# Altium PCB TG21_Slave_Device_Led.PcbDoc
Units mil, origin at the board's own origin, x right, y up, seen from the top; angles counter-clockwise.
Board outline 3544 x 2755 mil, 2 copper layers (Top Layer, Bottom Layer), stack 61.855 mil thick; 56 components, 34 nets, 157 pads, 520 vias.
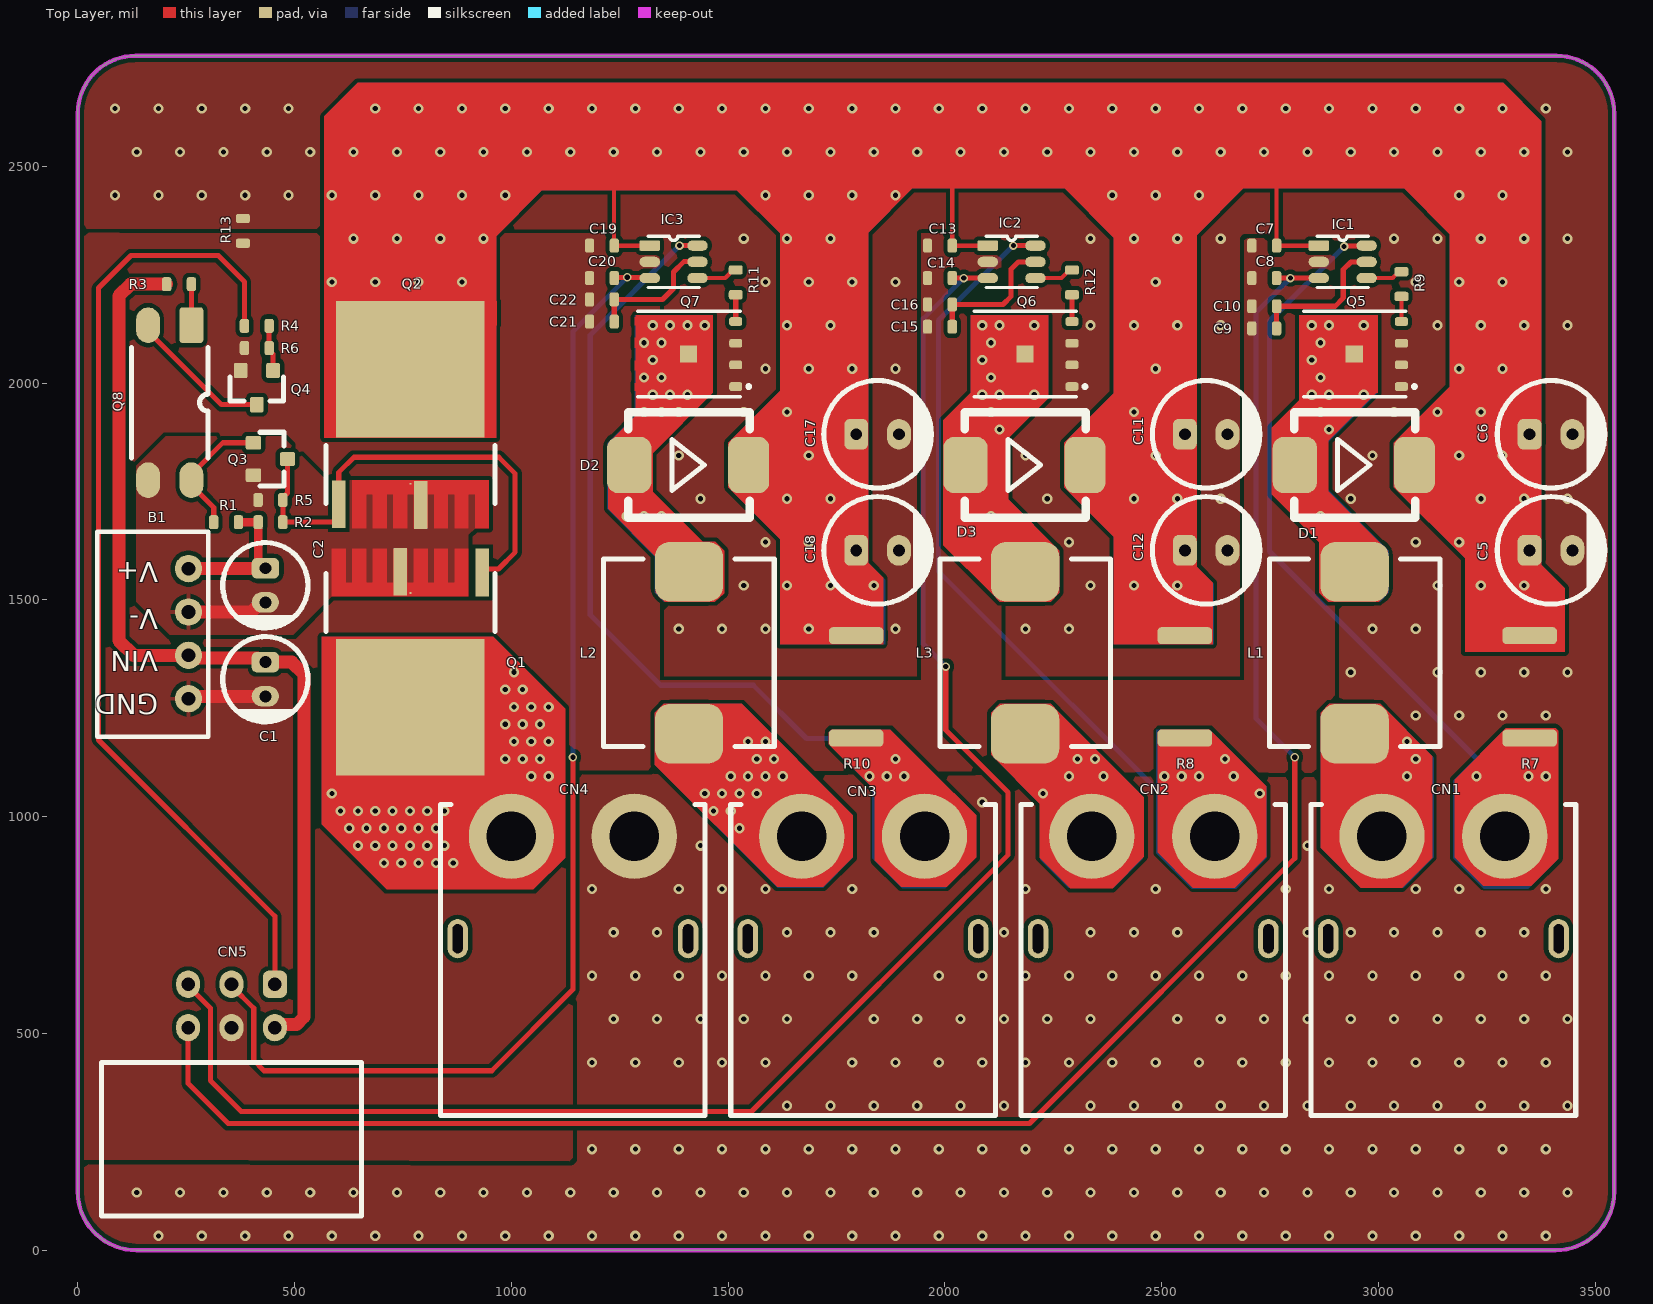
[diagram p0: Top Layer view]
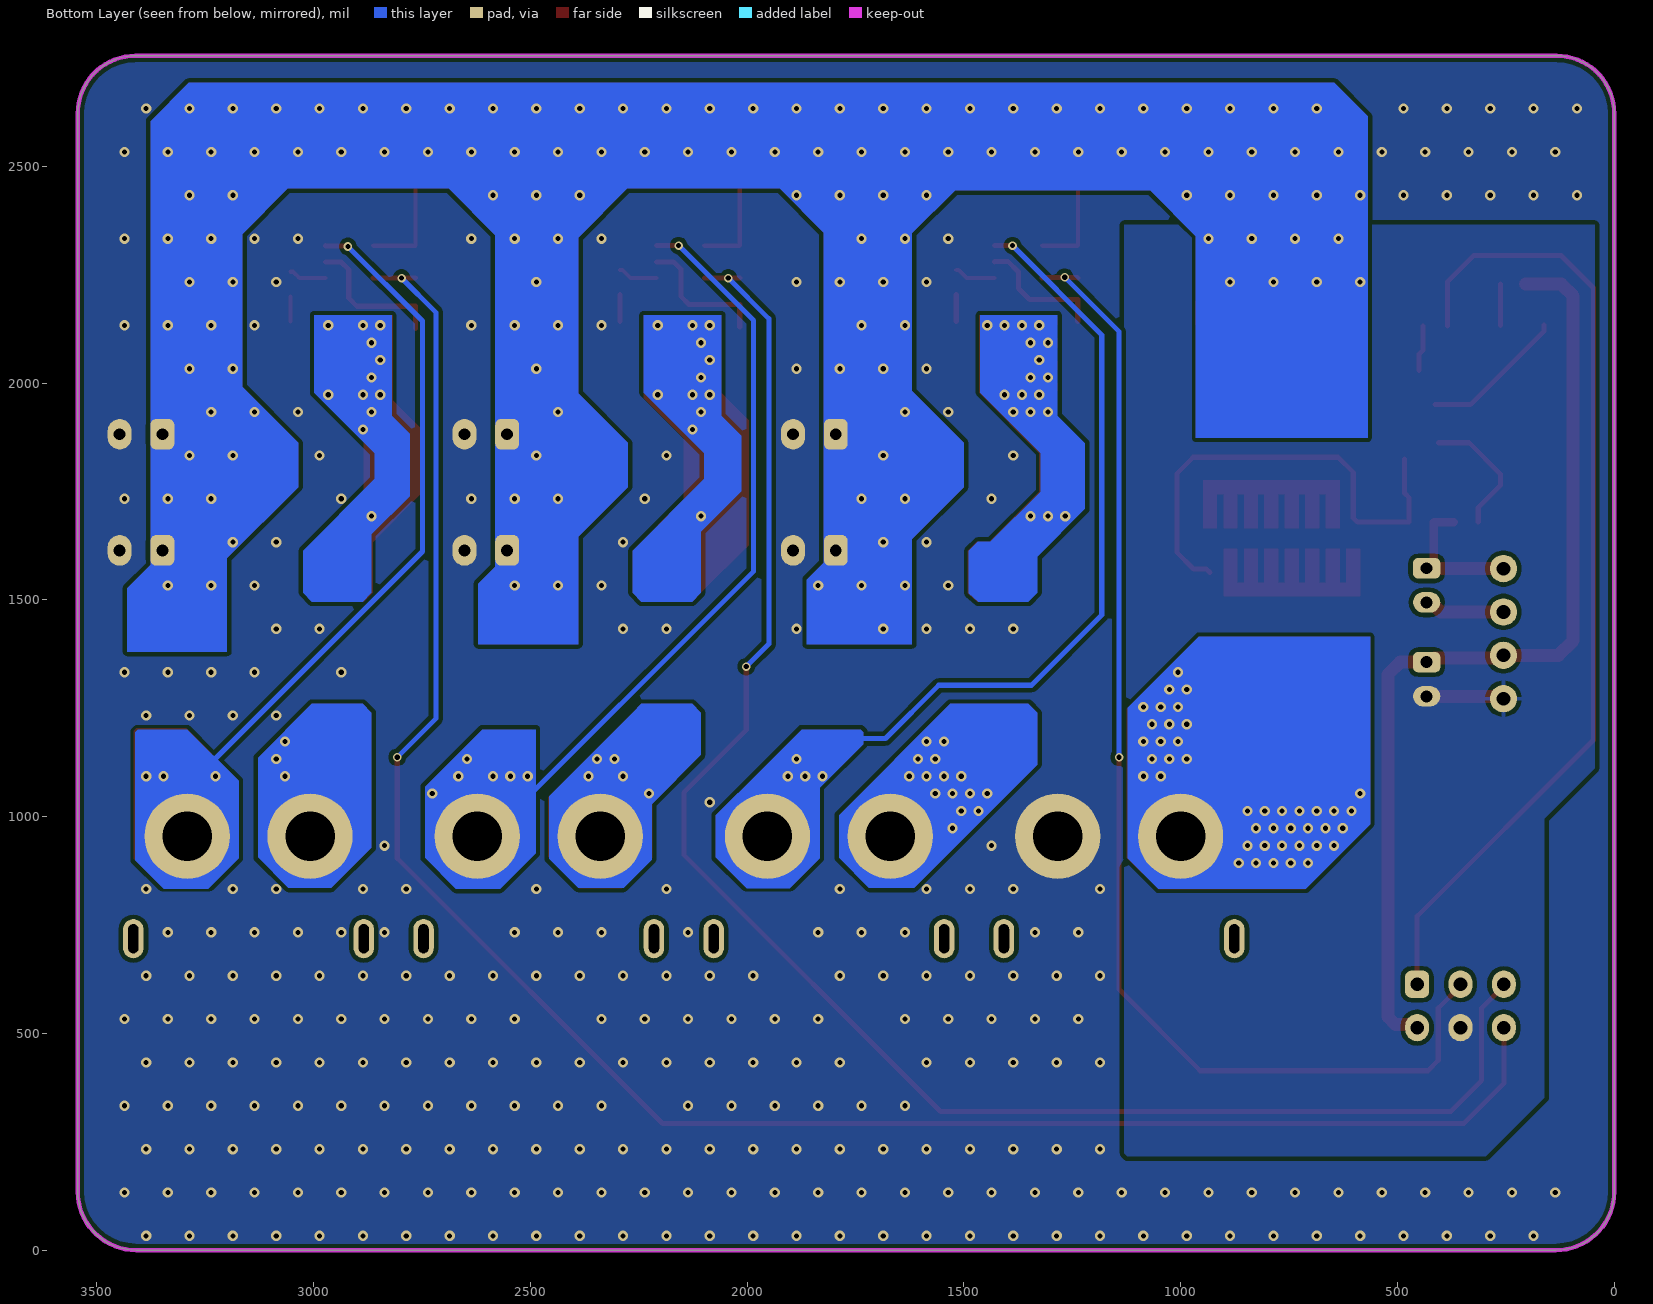
[diagram p1: Bottom Layer view, seen from below]
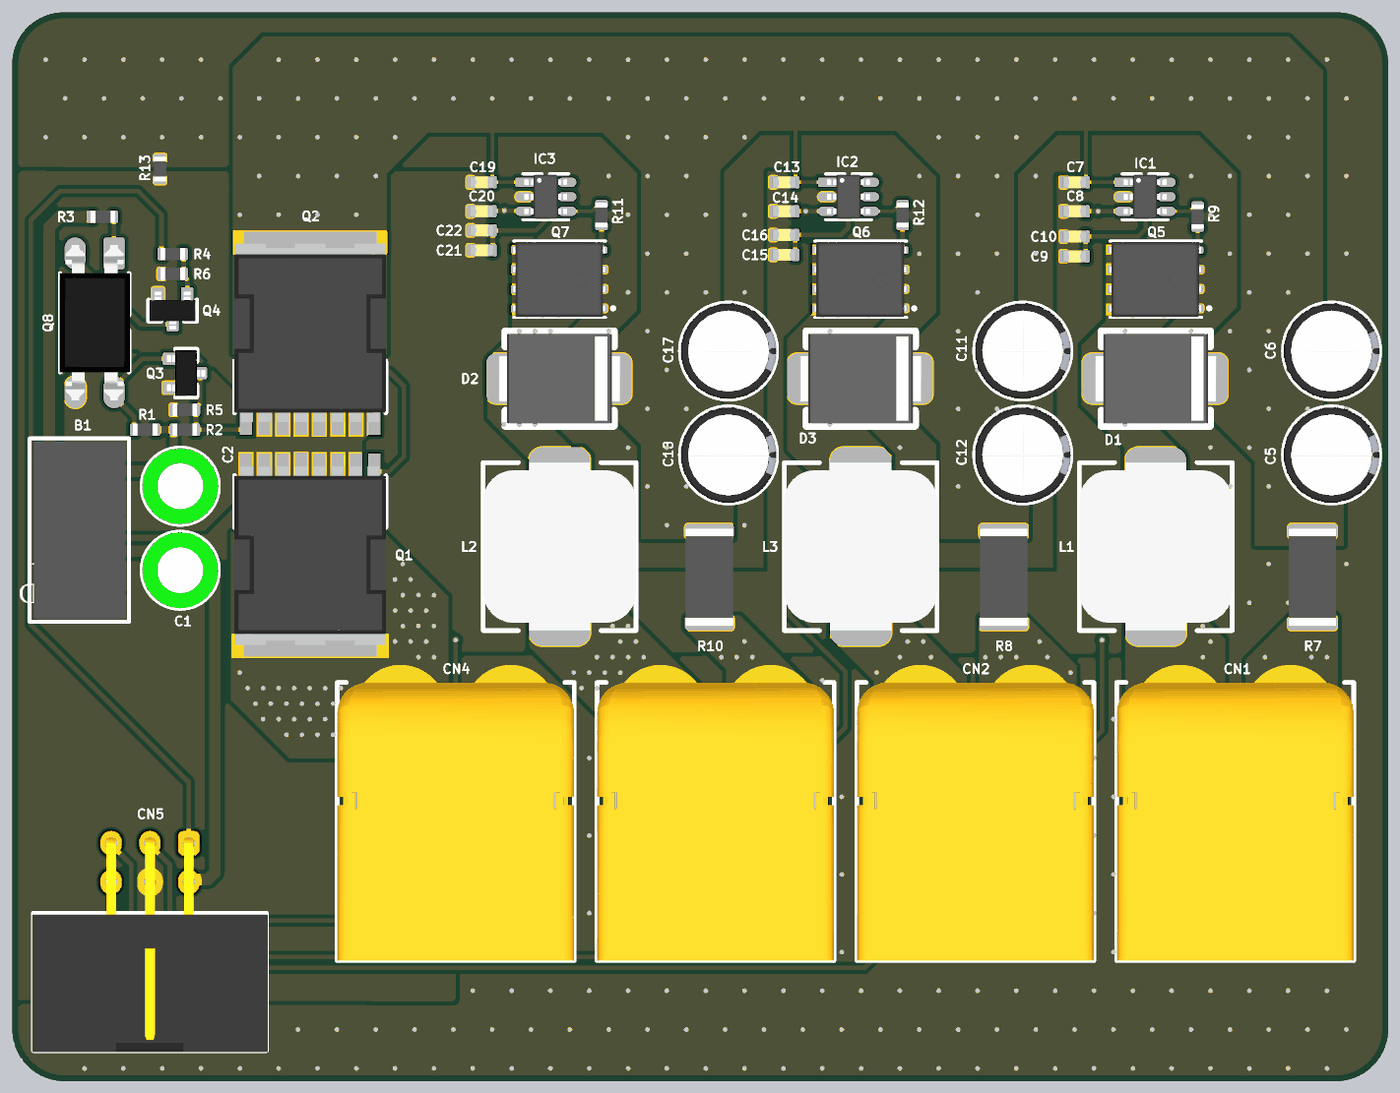
[diagram p2: 3D render of the assembled board from above, using the file's embedded part models]

## Layer stack, top to bottom
Top Solder: solder mask 0.4, Solder Resist, Dk 3.5
Top Layer: signal copper 1.4
Dielectric 1: dielectric 59.0551, FR-4, Dk 4.8
Bottom Layer: signal copper 1.4
Bottom Solder: solder mask 0.4, Solder Resist, Dk 3.5

## Board outline
0,135.01 0,2621.54 cw(c133.46,2621.54) 133.46,2755 3410.54,2755 cw(c3410.54,2621.54) 3544,2621.54 3544,135.01 cw(c3408.99,135.01) 3408.99,0 135.01,0 cw(c135.01,135.01)

## Design rules (kind name [scope] priority, off if disabled: settings)
BoardOutlineClearance [All] p1: gap=7.87 ignorepadtopadclearanceinfootprint=FALSE
Clearance [All] p1: gap=10 ignorepadtopadclearanceinfootprint=FALSE
ComponentClearance [All] p1: gap=5 collisioncheckmode=3 verticalgap=5 showdistances=TRUE
DiffPairsRouting [All] p1: maxlimit=10 minlimit=5 mostfreqgap=5 toplayer_minwidth=5 toplayer_maxwidth=1000 toplayer_prefwidth=5 bottomlayer_minwidth=5 bottomlayer_maxwidth=1000 bottomlayer_prefwidth=5 maxuncoupledlength=500
Height [All] p1: minheight=0 maxheight=71497.94 prefheight=500
HoleSize [All] p1: absolutevalues=TRUE maxlimit=248.03 minlimit=11.81 maxpercent=80.000 minpercent=20.000
HoleToHoleClearance [All] p1: gap=9.84 allowstackedmicrovias=FALSE
MinimumAnnularRing [All] p1: minimumring=3
MinimumSolderMaskSliver [All] p1: minsoldermaskwidth=0
PlaneClearance [All] p1: clearance=5
PlaneConnect PlaneConnectPowerPads [InPadClass('PowerPads')] p1: planeconnectstyle=Direct reliefexpansion=20 reliefentries=4 reliefconductorwidth=10 reliefairgap=10
PlaneConnect [All] p2: pad.planeconnectstyle=Relief pad.reliefexpansion=11.81 pad.reliefentries=4 pad.reliefconductorwidth=5 pad.reliefairgap=5 via.planeconnectstyle=Direct via.reliefexpansion=11.81 via.reliefentries=4 via.reliefconductorwidth=5 via.reliefairgap=5
PolygonConnect PolygonConnectPowerPads [All vs (InPadClass('PowerPads'))] p1: connectstyle=Direct reliefconductorwidth=10 reliefentries=4 polygonreliefangle="90 Angle" airgapwidth=10
PolygonConnect [All] p2: connectstyle=Direct reliefconductorwidth=5 reliefentries=4 polygonreliefangle="90 Angle" airgapwidth=5
RoutingVias [All] p1: holewidth=11.81 width=23.62 viastyle="Through Hole" minholewidth=11.81 minwidth=23.62 maxholewidth=23.62 maxwidth=259.84
SilkToSilkClearance [All] p1: silktosilkclearance=0
SilkToSolderMaskClearance [IsPad] p1: minsilkscreentomaskgap=5 clearancetoexposedcopper=TRUE
SolderMaskExpansion [All] p1: expansion=2.95 istentingtop=FALSE
Width [All] p1: maxlimit=1000 minlimit=5 preferedwidth=5 minimp=50.000000 maximp=50.000000 favimp=50.000000
20 further rules are at their usual default settings.

## Components (designator, comment, footprint, x,y, rotation, side; value= is the part's Value field where it differs from the comment)
B1 "B1212S-1W" SIP-4 255.59,1272.05 r90 top
C1 "4.7uF" PLUGIN,D5xL11mm 432.75,1316.93 r270 top
C2 "4.7uF" PLUGIN,D5xL11mm 432.75,1533.47 r270 top
C5 "47uF" PLUGIN,D6.3xL12mm 3397.98,1614.17 r0 top
C6 "47uF" PLUGIN,D6.3xL12mm 3397.98,1881.89 r0 top
C7 "100nF" CAP-0603 2736.57,2316.93 r180 top
C8 "100pF" CAP-0603 2736.57,2242.13 r180 top
C9 "1uF" CAP-0603 2736.57,2125.99 r180 top
C10 "100nF" CAP-0603 2736.57,2177.17 r180 top
C11 "47uF" PLUGIN,D6.3xL12mm 2602.71,1881.89 r0 top
C12 "47uF" PLUGIN,D6.3xL12mm 2602.71,1614.17 r0 top
C13 "100nF" CAP-0603 1988.54,2316.93 r180 top
C14 "100pF" CAP-0603 1988.54,2242.13 r180 top
C15 "1uF" CAP-0603 1988.54,2129.92 r180 top
C16 "100nF" CAP-0603 1988.54,2181.1 r180 top
C17 "47uF" PLUGIN,D6.3xL12mm 1844.84,1881.89 r0 top
C18 "47uF" PLUGIN,D6.3xL12mm 1844.84,1614.17 r0 top
C19 "100nF" CAP-0603 1209.01,2316.93 r180 top
C20 "100pF" CAP-0603 1209.01,2242.13 r180 top
C21 "1uF" CAP-0603 1209.01,2141.73 r180 top
C22 "100nF" CAP-0603 1209.01,2192.91 r180 top
CN1 "XT60PW-M" XT60PW-M 3149.95,718.5 r180 top locked
CN2 "XT60PW-M" XT60PW-M 2480.66,718.5 r180 top locked
CN3 "XT60PW-M" XT60PW-M 1811.37,718.5 r180 top locked
CN4 "XT60PW-M" XT60PW-M 1142.08,718.5 r180 top locked
CN5 "IDC2.54-3P" "IDC Through Hole,Right Angle,P=2.54mm, 2x3P" 354.68,563.39 r0 top locked
D1 "B560C-13-F" SMC 2945.23,1811.02 r0 top
D2 "B560C-13-F" SMC 1409.8,1811.02 r0 top
D3 "B560C-13-F" SMC 2185.39,1811.02 r0 top
IC1 "FL7760BM6X" SOT23-6 2917.67,2279.53 r0 top
IC2 "FL7760BM6X" SOT23-6 2153.89,2279.53 r0 top
IC3 "FL7760BM6X" SOT23-6 1374.36,2279.53 r0 top
L1 "22uH" SMD,11x10mm 2945.23,1377.95 r90 top
L2 "22uH" SMD,11x10mm 1409.8,1377.95 r90 top
L3 "22uH" SMD,11x10mm 2185.39,1377.95 r90 top
Q1 "SFT018N100C3" TOLL 767.4,1356.3 r270 top
Q2 "SFT018N100C3" TOLL 767.4,1927.17 r90 top
Q3 "1P" SOT-23 447.91,1824.8 r0 top
Q4 "1P" SOT-23 413.07,1986.22 r270 top
Q5 "TPH3R70A" PDFN5060-8L-1.1MM 2945.23,2066.93 r180 top
Q6 "TPH3R70A" PDFN5060-8L-1.1MM 2185.39,2066.93 r180 top
Q7 "TPH3R70A" PDFN5060-8L-1.1MM 1409.8,2066.93 r180 top
Q8 "PC817C" SOP-4 212.28,1954.73 r270 top
R1 "10K" RES-0603 342.2,1679.13 r0 top
R2 "1K" RES-0603 444.57,1679.13 r180 top
R3 "1K" RES-0603 233.74,2228 r0 top
R4 "1K" RES-0603 413.07,2131.89 r0 top
R5 "10K" RES-0603 444.57,1730.32 r0 top
R6 "10K" RES-0603 413.07,2080.71 r0 top
R7 "33mR" RES-2512 3348.77,1299.21 r90 top
R8 "33mR" RES-2512 2553.5,1299.21 r90 top
R9 "0R" RES-0603 3053.1,2228.35 r90 top
R10 "33mR" RES-2512 1795.62,1299.21 r90 top
R11 "0R" RES-0603 1517.67,2232.28 r90 top
R12 "0R" RES-0603 2293.26,2232.28 r90 top
R13 "0R" RES-0603 381,2351 r270 top

## Footprints (in the part's own frame and the unit in brackets; to place one, negate y for a bottom-side part, rotate by r counter-clockwise, add the part's x,y. Pads: shape width x height; smd on the part's side, far side on the other; paste and mask are expansions set on the pad)
CAP-0603 [mm]
  rrect50% 0.55x0.82 smd: 1(-0.725,0) 2(0.725,0)
  body extent -0.8,-0.4 0.8,0.4, height 0.8
"IDC Through Hole,Right Angle,P=2.54mm, 2x3P" [mm]
  rrect50% 1.4x1.6 hole 0.8 mask+0.15: 1(2.54,1.27)
  oval 1.4x1.6 hole 0.8 mask+0.15: 2(0,1.27) 3(-2.54,1.27) 4(-2.54,-1.27) 5(0,-1.27) 6(2.54,-1.27)
  silkscreen extent -7.62,-12.31 7.62,-3.31, body extent -7.71,-12.4 7.71,1.62, height 8.8
PDFN5060-8L-1.1MM [mm]
  rrect50% 0.76x0.51 smd: 1(-2.74,1.905) 2(-2.74,0.635) 3(-2.74,-0.635) 4(-2.74,-1.905)
  rect 1x1 smd paste-1 mask+0: 5_8(0.025,0)
  Top Layer region: 3.18,1.7 2.63,1.7 2.63,0.94 3.18,0.94 3.18,0.38 2.63,0.38 2.63,-0.38 3.18,-0.38 3.18,-0.94 2.63,-0.94 2.63,-1.7 3.18,-1.7 3.18,-2.16 2.63,-2.16 2.63,-2.26 -1.34,-2.26 -1.34,2.26 2.63,2.26 2.63,2.16 3.18,2.16
  silkscreen extent -3.6,-2.5 3,2.5, body extent -2.97,-2.45 3.03,2.45, height 1.1
PLUGIN,D5xL11mm [mm]
  rrect50% 1.2x1.6 hole 0.7: 1(-1,0)
  oval 1.2x1.6 hole 0.7: 2(1,0)
  silkscreen extent -2.5,-2.5 2.5,2.5, body extent -2.5,-2.5 2.5,2.5, height 12
PLUGIN,D6.3xL12mm [mm]
  rrect50% 1.4x1.8 hole 0.7: 1(-1.25,0)
  oval 1.4x1.8 hole 0.7: 2(1.25,0)
  silkscreen extent -3.15,-3.15 3.15,3.15, body extent -3.15,-3.15 3.15,3.15, height 12
RES-0603 [mm]
  rrect50% 0.55x0.82 smd: 1(-0.725,0) 2(0.725,0)
  body extent -0.8,-0.4 0.8,0.4, height 0.45
RES-2512 [mm]
  rrect50% 1x3.2 smd: 1(-3,0) 2(3,0)
  body extent -3.17,-1.55 3.17,1.55, height 0.65
SIP-4 [mm]
  round 1.6 hole 0.8: 1(0,0) 2(2.54,0) 3(5.08,0) 4(7.62,0)
  silkscreen extent -2.23,-1.15 9.77,5.35, body extent -2.03,-0.92 9.57,5.07, height 10
SMC [mm]
  rrect50% 2.6x3.3 smd: 1(-3.5,0)
  rrect50% 2.4x3.3 smd: 2(3.5,0)
  silkscreen extent -3.55,-3.1 3.55,3.1, body extent -3.97,-2.95 3.97,2.95, height 2.27
SMD,11x10mm [mm]
  rrect50% 3.5x4 smd: 1(-4.75,0) 2(4.75,0)
  silkscreen extent -5.5,-5 5.5,5, body extent -5.5,-5 5.5,5, height 7.9
SOP-4 [mm]
  rrect25% 2.09x1.39 smd: 1(-4.54,1.27)
  oval 2.09x1.39 smd: 2(-4.54,-1.27) 3(4.54,-1.27) 4(4.54,1.27)
  silkscreen extent -3.22,-2.25 3.22,2.25, body extent -5.08,-2.3 5.08,2.3, height 3.78
SOT23-6 [mm]
  rrect25% 1.2x0.6 smd: 1(-1.4,0.95)
  oval 1.2x0.6 smd: 2(-1.4,0) 3(-1.4,-0.95) 4(1.4,-0.95) 5(1.4,0) 6(1.4,0.95)
  silkscreen extent -1.5,-1.5 1.5,1.5, body extent -1.4,-1.45 1.4,1.45, height 1.45
SOT-23 [mm]
  rrect25% 0.9x0.8 smd: 1(-1.085,0.95) 2(-1.085,-0.95) 3(0.915,0)
  silkscreen extent -0.7,-1.57 0.7,1.57, body extent -1.25,-1.5 1.25,1.5, height 1.1
TOLL [mm]
  rect 2.8x0.8 smd: 1(-5.25,4.2) 2(-5.3,-0.6)
  rect 0.1x0.1 smd paste-1 mask+0: 2(-4.05,0) 3(0,0)
  rect 8x8.7 smd: 3(2.65,0)
  Top Layer region: 6.65,-5.05 5.25,-5.05 5.25,-4.35 2.35,-4.35 2.35,-4.85 -1.35,-4.85 -1.35,4.85 2.35,4.85 2.35,4.35 5.25,4.35 5.25,5.05 6.65,5.05
  Top Layer region: -3.85,-4.6 -6.65,-4.6 -6.65,-3.8 -4.65,-3.8 -4.65,-3.4 -6.65,-3.4 -6.65,-2.6 -4.65,-2.6 -4.65,-2.2 -6.65,-2.2 -6.65,-1.4 -4.65,-1.4 -4.65,-1 -6.65,-1 -6.65,-0.2 -4.65,-0.2 -4.65,0.2 -6.65,0.2 -6.65,1 -4.65,1 -4.65,1.4 -6.65,1.4 -6.65,2.2 -4.65,2.2 -4.65,2.6 -6.65,2.6 -6.65,3.4 -3.85,3.4
  silkscreen extent -5.2,-4.95 -1.8,4.95, body extent -5.79,-4.95 5.89,4.95, height 2.31
XT60PW-M [mm]
  round 5 hole 2.9 mask+0.5: 1(3.6,-6) 2(-3.6,-6)
  oval 1.2x2.3 hole 0.6 slot 1.7 at 90 deg: ""(-6.75,0) ""(6.75,0)
  silkscreen extent -7.75,-7.85 7.75,10.35, body extent -7.75,-7.85 7.75,10.35, height 8.4

## Part data
B1: library part B1212-1W, "Isolated Module DC DC Converter Buck 1 Output 12V 84mA 10.8V~13.2V Input", LCSC Part #=C512042, Manufacturer=RLT, Package=SIP,11.6x6mm, Key Attributes="DC-DC modular power supply/1000V isolation, 1W", Link=https://www.lcsc.com/product-detail/C512042.html?s_z=n_q_p_B1212-1W&spm=wm.ssy.bg.0.xh&lcsc_vid=Q1VfX1ReRFFaUFJSRgIIUV0CFFgIBFJfT1hdVlwEEVkxVlNRT1RZVlVRTlFWUTsOAxUeFF5JWBYZEEoKFBINSQcJGk4NBhADEA4cHktXRFZWSQwSGg0%3D, Mfr. Part #=B1212S-1W
C1 C2: library part 50YXF4R7MEFC5X11, "4.7uF 50V Aluminum Electrolytic Capacitors Through Hole,D5xL11mm 5000hrs@105℃", DigiKey Part Number=1189-1862-ND, LCSC Part #=C88759, Manufacturer=Rubycon, Package="Through Hole,D5xL11mm", ComponentLink1Description=Link, ComponentLink1URL=https://www.lcsc.com/product-detail/C88759.html, ComponentLink2Description="Link 1", ComponentLink2URL=https://www.digikey.com/en/products/detail/rubycon/50YXF4-7MEFC5X11/3562866?s=N4IgTCBcDaIKwAYCaANAYgFgEoHYCyAomgMJwoCM5IAugL5A, Mfr.Part #=50YXF4R7MEFC5X11
C5 C6 C11 C12 C17 C18: library part ERS1JM470E12OT, "47uF 63V Aluminum Electrolytic Capacitors Through Hole,D6.3xL12mm 5000hrs@105℃", DigiKey Part Number=NO, LCSC Part #=C106674, Manufacturer=AISHI, Package="Through Hole,D6.3xL12mm", ComponentLink1Description=Link, ComponentLink1URL=https://www.lcsc.com/product-detail/C106674.html?s_z=n_C106674, ComponentLink2Description="Link 1", Mfr.Part #=ERS1JM470E12OT
C7 C10 C13 C16 C19 C22: library part CL10B104KB8NNNC, "100nF ±10% 50V Ceramic Capacitor X7R 0603", DigiKey Part Number=1276-1000-2-ND, LCSC Part #=C1591, Manufacturer="Samsung Electro-Mechanics", Package=0603, ComponentLink1Description=Link, ComponentLink1URL=https://www.lcsc.com/product-detail/C1591.html?s_z=n_CL10B104KB8NNC, ComponentLink2Description="Link 1", ComponentLink2URL=https://www.digikey.com/en/products/detail/samsung-electro-mechanics/CL10B104KB8NNNC/3886658?s=N4IgTCBcDaIMIBkCMAGAQqgLAaTQDgDki4QBdAXyA, Mfr.Part #=CL10B104KB8NNNC
C8 C14 C20: library part CL10C101JB8NNNC, "100pF ±5% 50V Ceramic Capacitor C0G 0603", DigiKey Part Number=1276-1008-2-ND, LCSC Part #=C14858, Manufacturer="Samsung Electro-Mechanics", Package=0603, ComponentLink1Description=Link, ComponentLink1URL=https://www.lcsc.com/product-detail/C14858.html?s_z=n_CL10C101JBNNNC, ComponentLink2Description="Link 1", ComponentLink2URL=https://www.digikey.com/en/products/detail/samsung-electro-mechanics/CL10C101JB8NNNC/3886666?s=N4IgTCBcDaIMIBkCMAGOqkCkBCAOAcoXCALoC%2BQA, Mfr.Part #=CL10C101JB8NNNC
C9 C15 C21: library part CL10B105KB8NQNC, "1uF ±10% 50V Ceramic Capacitor X7R 0603", DigiKey Part Number=NO, LCSC Part #=C5199872, Manufacturer="Samsung Electro-Mechanics", Package=0603, ComponentLink1Description=Link, ComponentLink1URL=https://www.lcsc.com/product-detail/C5199872.html, ComponentLink2Description="Link 1", Mfr.Part #=CL10B105KB8NQNC
CN1 CN2 CN3 CN4: "Banana and Tip Connector Adapters RoHS", DigiKey Part Number=NO, LCSC Part #=C98732, Manufacturer="Changzhou Amass Elec", ComponentLink1Description=Link, ComponentLink1URL=https://www.lcsc.com/product-detail/C98732.html?s_z=n_XT60, Mfr.Part #=XT60PW-M, Package=XT60PW-M
CN5: library part 2.54-2*3P, "Connector IDC Header Through Hole, Right Angle 6 position 2.54mm", DigiKey Part Number=NO, LCSC Part #=C34945, Manufacturer="BOOMELE(Boom Precision Elec)", Package="Through Hole,Right Angle,P=2.54mm", ComponentLink1Description=Link, ComponentLink1URL=https://www.lcsc.com/product-detail/C34945.html, Mfr.Part #=2.54-2*3P, System=Connector
D1 D2 D3: "100A 1 Independent 60V 700mV@5A 5A SMC(DO-214AB) Single Diodes RoHS", DigiKey Part Number=NO, LCSC Part #=C85100, Manufacturer=DIODES, Package=SMC(DO-214AB), ComponentLink1Description=Link, ComponentLink1URL=https://www.lcsc.com/product-detail/C85100.html?s_z=n_C85100, ComponentLink2Description="Link 1", ComponentLink2URL=https://www.digikey.com/en/products/detail/diodes-incorporated/B560C-13-F/768773, Mfr.Part #=B560C-13-F
IC1 IC2 IC3: "High-Side Sensing Constant Current Buck Controller for High Switching Frequency LED Driver", DigiKey Part Number=FL7760BM6XOSTR-ND, LCSC Part #=C367388, Manufacturer=onsemi, Package=SOT-23-6, ComponentLink1Description=Link, ComponentLink1URL=https://www.lcsc.com/product-detail/C367388.html?s_z=n_FL7760&spm=wm.ssy.bg.0.xh&lcsc_vid=QVhYA1deElkMBVEAQVVWVAECEVVXUAcCTgNYUQVSEVAxVlNRQ1hYVFBfTlhcXzsOAxUeFF5JWBYZEEoKFBINSQcJGk4eFQsCAgIaSgADAwAHC0slRlleUFNRQlhADxALGw%3D%3D, ComponentLink2Description="Link 1", ComponentLink2URL=https://www.digikey.com/en/products/detail/onsemi/FL7760BM6X/7804375?s=N4IgTCBcDaIGIBkDsSBsAGAQgWVQDRAF0BfIA, Mfr.Part #=FL7760BM6X
L1 L2 L3: library part PSPMAA1082T-220M-CGP, "8A 22uH 35mΩ 10A Molded Inductor ±20% SMD,11x10mm Fixed Inductors RoHS", DigiKey Part Number=NO, LCSC Part #=C47149121, Manufacturer="PROD Tech", Package=SMD,11x10mm, ComponentLink1Description=Link, ComponentLink1URL=https://www.lcsc.com/product-detail/C47149121.html?s_z=n_C47149121, ComponentLink2Description="Link 1", Mfr.Part #=PSPMAA1082T-220M-CGP
Q1 Q2: "N-Channel 100V 320A 312W Surface Mount TOLL", DigiKey Part Number=NO, LCSC Part #=C42395330, Manufacturer=SCILICON, Package=TOLL, ComponentLink1Description=Link, ComponentLink1URL=https://www.lcsc.com/product-detail/C42395330.html?s_z=n_c42395330, ComponentLink2Description="Link 1", Mfr.Part #=SFT018N100C3
Q3 Q4: library part MMBT2222ALT1G, "Bipolar (BJT) Transistor NPN 40V 600mA 225mW Surface Mount SOT-23", DigiKey Part Number=MMBT2222ALT1GOSTR-ND, LCSC Part #=C82460, Manufacturer=onsemi, Package=SOT-23, ComponentLink1Description=Link, ComponentLink1URL=https://www.lcsc.com/product-detail/C82460.html?s_z=n_mmbt, ComponentLink2Description="Link 1", ComponentLink2URL=https://www.digikey.com/en/products/detail/onsemi/MMBT2222ALT1G/919593, Mfr.Part #=MMBT2222ALT1G
Q5 Q6 Q7: library part TPH3R70APL,L1Q(M, "N-Channel 100V 90A 170W SOP-8-Advance", DigiKey Part Number=264-TPH3R70APLL1QTR-ND, LCSC Part #=C471285, Manufacturer=TOSHIBA, Package=PDFN5060-8L, ComponentLink1Description=Link, ComponentLink1URL=https://www.lcsc.com/product-detail/C20605803.html?s_z=n_YJG60N04AQ, ComponentLink2Description="Link 1", ComponentLink2URL=264-TPH3R70APLL1QTR-ND, Mfr.Part #=TPH3R70APL,L1Q(M
Q8: library part "HXY MOSFET PC817C", "Phototransistor Output 5kVrms 1 Channel SMD-4P", DigiKey Part Number=NO, LCSC Part #=C5451663, Manufacturer="HXY MOSFET", Package=SMD-4P, ComponentLink1Description=Link, ComponentLink1URL=https://www.lcsc.com/product-detail/C5451663.html?s_z=n_c5451663, ComponentLink2Description="Link 1", Mfr.Part #=PC817C
R1 R5 R6: library part RC0603FR-0710KL, "100mW 10kΩ 75V Thick Film Resistor ±100ppm/℃ ±1% 0603 Chip Resistor - Surface Mount RoHS", DigiKey Part Number=311-10.0KHRTR-ND, LCSC Part #=C98220, Manufacturer=YAGEO, Package=0603, ComponentLink1Description=Link, ComponentLink1URL=https://www.lcsc.com/product-detail/C98220.html?s_z=n_C98220, ComponentLink2Description="Link 1", ComponentLink2URL=https://www.digikey.com/en/products/detail/yageo/RC0603FR-0710KL/726880?s=N4IgTCBcDaIMwEYEFoEAYB0aDSAJASgCr7IByAIiALoC%2BQA, Mfr.Part #=RC0603FR-0710KL
R2 R3 R4: library part RC0603FR-071KL, "100mW 1kΩ 75V Thick Film Resistor ±100ppm/℃ ±1% 0603 Chip Resistor - Surface Mount RoHS", DigiKey Part Number=311-1.00KHRTR-ND, LCSC Part #=C22548, Manufacturer=YAGEO, Package=0603, ComponentLink1Description=Link, ComponentLink1URL=https://www.lcsc.com/product-detail/C22548.html?s_z=n_C22548, ComponentLink2Description="Link 1", ComponentLink2URL=https://www.digikey.com/en/products/detail/yageo/RC0603FR-071KL/726843?s=N4IgTCBcDaIEoGEAMA2JBmAYnAtEg7AIwDSAMiALoC%2BQA, Mfr.Part #=RC0603FR-071KL
R7 R8 R10: library part HoLLR2512-3W-33mR-1%, "33mΩ 3W Current Sense Resistor ±1% ±50ppm/℃ 2512 Chip Resistor - Surface Mount RoHS", DigiKey Part Number=NO, LCSC Part #=C2985721, Manufacturer=Milliohm, Package=2512, ComponentLink1Description=Link, ComponentLink1URL=https://www.lcsc.com/product-detail/C2985721.html?spm=wm.fly.bg.0.xh&lcsc_vid=EQVeAlBQE1lfUQdeRVANVgZXElUKUAUCRwdWVVRWQVUxVlNRQ1hbUlRURFJdVDtW, ComponentLink2Description="Link 1", Mfr.Part #=HoLLR2512-3W-33mR-1%
R9 R11 R12 R13: library part RC0603FR-070RL, "0Ω 100mW 75V Thick Film Resistor ±1% 0603 Chip Resistor - Surface Mount RoHS", DigiKey Part Number=311-0.0HRTR-ND, LCSC Part #=C100044, Manufacturer=YAGEO, Package=0603, ComponentLink1Description=Link, ComponentLink1URL=https://www.lcsc.com/product-detail/C100044.html?s_z=n_0R, ComponentLink2Description="Link 1", ComponentLink2URL=https://www.digikey.com/en/products/detail/yageo/RC0603FR-070RL/1304008?s=N4IgTCBcDaIEoGEAMA2JBmAYnAtEg7EnADIgC6AvkA, Mfr.Part #=RC0603FR-070RL

## Via types
v1: diameter 23.62, hole 11.81, Top Layer to Bottom Layer, tented both sides, 511 vias
v2: diameter 19.68, hole 11.81, Top Layer to Bottom Layer, tented both sides, 9 vias

## Nets (pads, with @x,y where several pads share a name; then routed paths per layer and width w, separated by ;. In a path a pad name is that pad's centre, name@x,y a point inside that pad or via, vN(x,y) a via of type N, cw(c..) or ccw(c..) an arc to the next point about the centre after c; other vN are vias at no path point)
+12VDC: B1.2 C1.1 CN5.6 R3.1 | length 2243.3
  Top Layer w30: R3.1 122,2228 95,2201 95,1406 128.95,1372.05 B1.2 261.64,1366 415.18,1366 416.26,1364.92 424.13,1364.92 C1.1 493.7,1356.3 522,1328 522,537.76 504.43,520.19 461.48,520.19 CN5.6
+12VDC_ISO_2: B1.4 C2.1 R1.2 R2.2 | length 337.3
  Top Layer w20: R1.2 R2.2 416.02,1586.32 429.51,1572.84 C2.1
  Top Layer w27.56: C2.1@432.36,1572.44 C2.1
  Top Layer w30: B1.4 C2.1@431.97,1572.05
AGND: B1.1 C1.2 C7.2 C8.2 C9.2 C10.2 C13.2 C14.2 C15.2 C16.2 C19.2 C20.2 C21.2 C22.2 CN5.5 IC1.2 IC2.2 IC3.2 Q4.2 R6.1 R13.2 | length 179.4
  Top Layer w30: B1.1 261.1,1277.56 C1.2
BAT_EN: CN4.1 Q1.3
  other v1: 706.17,893.07 746.17,893.07 786.17,893.07 826.17,893.07 866.17,893.07 646.17,933.07 686.17,933.07 726.17,933.07 766.17,933.07 806.17,933.07 846.17,933.07 626.17,973.07 666.17,973.07 706.17,973.07 746.17,973.07 786.17,973.07 826.17,973.07 606.17,1013.07 646.17,1013.07 686.17,1013.07 726.17,1013.07 766.17,1013.07 806.17,1013.07 846.17,1013.07 586.17,1053.07 1046.17,1093.07 1086.17,1093.07 986.17,1133.07 1026.17,1133.07 1066.17,1133.07 1006.17,1173.07 1046.17,1173.07 1086.17,1173.07 986.17,1213.07 1026.17,1213.07 1066.17,1213.07 1006.17,1253.07 1046.17,1253.07 1086.17,1253.07 986.17,1293.07 1026.17,1293.07 1006.17,1333.07
DIM1: C8.1 CN5.4 IC1.3 | length 4478.3
  Top Layer w11.81: CN5.4 254.68,384.32 347,292 2195,292 2807,904 v2(2807,1137) ; C8.1 v2(2797,2242.13) IC1.3
  Bottom Layer w11.81: v2(2797,2242.13) 2718,2163.13 2718,1226 v2(2807,1137)
DIM2: C14.1 CN5.3 IC2.3 | length 3890
  Top Layer w11.81: CN5.3 254.68,609.45 306,558.13 306,391 377,320 1554,320 2146,912 2146,1055.94 2002,1199.94 v2(2002,1346) ; C14.1 v2(2043.61,2242.13) IC2.3
  Bottom Layer w11.81: v2(2002,1346) 1950,1398 1950,2148.51 v2(2043.61,2242.13)
DIM3: C20.1 CN5.2 IC3.3 | length 2797.9
  Top Layer w11.81: CN5.2 354.68,609.45 406,558.13 406,437.94 429.94,414 955,414 1142,601 v2(1142,1137) ; C20.1 1238.49,2243.06 1266.65,2243.06 v2(1267.59,2244) ; v2@1268,2244 1268.94,2243.06 1318.31,2243.06 IC3.3
  Bottom Layer w11.81: v2(1142,1137) 1142,2118.41 v2(1267.59,2244)
EN_FET_ISO: CN5.1 R4.1 | length 2268.3
  Top Layer w11.81: R4.1 384.53,2233.48 324,2294 123,2294 48,2219 48,1177 454.68,770.32 CN5.1
G_FET_ISO: Q1.1 Q2.1 Q3.3 R2.1 R5.2 | length 1102.1
  Top Layer w11.81: Q3.3 483.94,1746.46 473.11,1735.63 R5.2 R2.1 592.2,1679.13 602.05,1688.98 Q2.1 602.05,1794.05 637,1829 971,1829 1009,1791 1009,1610 970.3,1571.3 941.06,1571.3 Q1.1
GND: C5.2 C6.2 C11.2 C12.2 C17.2 C18.2 CN4.2 Q5.1 Q5.2 Q5.3 Q6.1 Q6.2 Q6.3 Q7.1 Q7.2 Q7.3 R13.1
  other v1: 186.17,33.07 286.17,33.07 386.17,33.07 486.17,33.07 586.17,33.07 686.17,33.07 786.17,33.07 886.17,33.07 986.17,33.07 1086.17,33.07 1186.17,33.07 1286.17,33.07 1386.17,33.07 1486.17,33.07 1586.17,33.07 1686.17,33.07 1786.17,33.07 1886.17,33.07 1986.17,33.07 2086.17,33.07 2186.17,33.07 2286.17,33.07 2386.17,33.07 2486.17,33.07 2586.17,33.07 2686.17,33.07 2786.17,33.07 2886.17,33.07 2986.17,33.07 3086.17,33.07 3186.17,33.07 3286.17,33.07 3386.17,33.07 136.17,133.07 236.17,133.07 336.17,133.07 436.17,133.07 536.17,133.07 636.17,133.07 736.17,133.07 836.17,133.07 936.17,133.07 1036.17,133.07 1136.17,133.07 1236.17,133.07 1336.17,133.07 1436.17,133.07 1536.17,133.07 1636.17,133.07 1736.17,133.07 1836.17,133.07 1936.17,133.07 2036.17,133.07 2136.17,133.07 2236.17,133.07 2336.17,133.07 2436.17,133.07 2536.17,133.07 2636.17,133.07 2736.17,133.07 2836.17,133.07 2936.17,133.07 3036.17,133.07 3136.17,133.07 3236.17,133.07 3336.17,133.07 3436.17,133.07 1186.17,233.07 1286.17,233.07 1386.17,233.07 1486.17,233.07 1586.17,233.07 1686.17,233.07 1786.17,233.07 1886.17,233.07 1986.17,233.07 2086.17,233.07 2186.17,233.07 2286.17,233.07 2386.17,233.07 2486.17,233.07 2586.17,233.07 2686.17,233.07 2786.17,233.07 2886.17,233.07 2986.17,233.07 3086.17,233.07 3186.17,233.07 3286.17,233.07 3386.17,233.07 1636.17,333.07 1736.17,333.07 1836.17,333.07 1936.17,333.07 2036.17,333.07 2136.17,333.07 2336.17,333.07 2436.17,333.07 2536.17,333.07 2636.17,333.07 2736.17,333.07 2836.17,333.07 2936.17,333.07 3036.17,333.07 3136.17,333.07 3236.17,333.07 3336.17,333.07 3436.17,333.07 1186.17,433.07 1286.17,433.07 1386.17,433.07 1486.17,433.07 1586.17,433.07 1786.17,433.07 1886.17,433.07 1986.17,433.07 2086.17,433.07 2186.17,433.07 2286.17,433.07 2386.17,433.07 2486.17,433.07 2586.17,433.07 2686.17,433.07 2786.17,433.07 2886.17,433.07 2986.17,433.07 3086.17,433.07 3186.17,433.07 3286.17,433.07 3386.17,433.07 1236.17,533.07 1336.17,533.07 1436.17,533.07 1536.17,533.07 1636.17,533.07 1836.17,533.07 1936.17,533.07 2036.17,533.07 2136.17,533.07 2236.17,533.07 2336.17,533.07 2536.17,533.07 2636.17,533.07 2736.17,533.07 2836.17,533.07 2936.17,533.07 3036.17,533.07 3136.17,533.07 3236.17,533.07 3336.17,533.07 3436.17,533.07 1186.17,633.07 1286.17,633.07 1386.17,633.07 1486.17,633.07 1586.17,633.07 1686.17,633.07 1786.17,633.07 1986.17,633.07 2086.17,633.07 2186.17,633.07 2286.17,633.07 2386.17,633.07 2486.17,633.07 2586.17,633.07 2686.17,633.07 2786.17,633.07 2886.17,633.07 2986.17,633.07 3086.17,633.07 3186.17,633.07 3286.17,633.07 3386.17,633.07 1236.17,733.07 1336.17,733.07 1636.17,733.07 1736.17,733.07 1836.17,733.07 2136.17,733.07 2336.17,733.07 2436.17,733.07 2536.17,733.07 2836.17,733.07 2936.17,733.07 3036.17,733.07 3136.17,733.07 3236.17,733.07 3336.17,733.07 1186.17,833.07 1386.17,833.07 1486.17,833.07 1586.17,833.07 1786.17,833.07 2186.17,833.07 2486.17,833.07 2786.17,833.07 2886.17,833.07 3086.17,833.07 3186.17,833.07 3386.17,833.07 1436.17,933.07 2836.17,933.07 2086.17,1033.07 3086.17,1233.07 3186.17,1233.07 3286.17,1233.07 3386.17,1233.07 2936.17,1333.07 3136.17,1333.07 3236.17,1333.07 3336.17,1333.07 3436.17,1333.07 1386.17,1433.07 1486.17,1433.07 1586.17,1433.07 1886.17,1433.07 2186.17,1433.07 2286.17,1433.07 2986.17,1433.07 3086.17,1433.07 1536.17,1533.07 2336.17,1533.07 3136.17,1533.07 1586.17,1633.07 2286.17,1633.07 3086.17,1633.07 1436.17,1733.07 2236.17,1733.07 2636.17,1733.07 2936.17,1733.07 3436.17,1733.07 1386.17,1833.07 2186.17,1833.07 2986.17,1833.07 1536.17,1933.07 3036.17,1933.07 1586.17,2033.07 1886.17,2033.07 2336.17,2133.07 2636.17,2133.07 3136.17,2133.07 3436.17,2133.07 1586.17,2233.07 1886.17,2233.07 3086.17,2233.07 1536.17,2333.07 2336.17,2333.07 2636.17,2333.07 3036.17,2333.07 3136.17,2333.07 3436.17,2333.07 86.17,2433.07 186.17,2433.07 286.17,2433.07 386.17,2433.07 486.17,2433.07 136.17,2533.07 236.17,2533.07 336.17,2533.07 436.17,2533.07 536.17,2533.07 3436.17,2533.07 86.17,2633.07 186.17,2633.07 286.17,2633.07 386.17,2633.07 486.17,2633.07 3386.17,2633.07
GND_ISO_2: B1.3 C2.2 Q1.2 Q2.2 Q3.2 Q8.3 R5.1 | length 186.3
  Top Layer w30: B1.3 400.25,1472.05 422.29,1494.1 C2.2
NetC9_1: C9.1 C10.1 IC1.5 | length 339.9
  Top Layer w11.81: C9.1 C10.1 2900.17,2177.17 2919,2196 2919,2262 2936.53,2279.53 IC1.5
NetC15_1: C15.1 C16.1 IC2.5 | length 320.8
  Top Layer w11.81: C15.1 C16.1 2134.1,2181.1 2153,2200 2153,2263 2169.53,2279.53 IC2.5
NetC21_1: C21.1 C22.1 IC3.5 | length 301.6
  Top Layer w11.81: C21.1 C22.1 1348.91,2192.91 1374,2218 1374,2256 1398,2280 1429.01,2280 IC3.5
NetCN1_1: CN1.1 L1.1
  other v1: 3066.17,1093.07 3086.17,1133.07 3066.17,1173.07
NetCN1_2: CN1.2 IC1.6 R7.1 | length 1708.9
  Top Layer w11.81: v2(2921,2315) 2921.97,2315.97 2971.82,2315.97 IC1.6
  Bottom Layer w11.81: v2(2921,2315) 2749,2143 2749,1611.24 3289.37,1070.87 3289.37,957.04 CN1.2
  other v1: 3226.17,1093.07 3346.17,1093.07 3386.17,1093.07
NetCN2_1: CN2.1 L3.1
  other v1: 2226.17,1053.07 2286.17,1093.07 2366.17,1093.07 2306.17,1133.07 2346.17,1133.07
NetCN2_2: CN2.2 IC2.6 R8.1 | length 1764.3
  Top Layer w11.81: v2(2158,2317) 2158.07,2316.93 IC2.6
  Bottom Layer w11.81: v2(2158,2317) 1985,2144 1985,1566 2596.28,954.73 CN2.2
  other v1: 2726.17,1053.07 2506.17,1093.07 2546.17,1093.07 2586.17,1093.07 2666.17,1093.07 2646.17,1133.07
NetCN3_1: CN3.1 L2.1
  other v1: 1526.17,973.07 1466.17,1013.07 1506.17,1013.07 1446.17,1053.07 1486.17,1053.07 1526.17,1053.07 1566.17,1053.07 1506.17,1093.07 1546.17,1093.07 1586.17,1093.07 1626.17,1093.07 1566.17,1133.07 1606.17,1133.07 1546.17,1173.07 1586.17,1173.07
NetCN3_2: CN3.2 IC3.6 R10.1 | length 1968
  Top Layer w11.81: v2@1388.03,2316.97 IC3.6
  Bottom Layer w11.81: v2(1388,2317) 1182,2111 1182,1465 1344,1303 1558,1303 1681,1180 1739.24,1180 v1(1826.17,1093.07) 1953.1,966.14 CN3.2
  other v1: 1866.17,1093.07 1906.17,1093.07 1886.17,1133.07
NetD1_1: D1.1 L1.2 Q5.5_8
  other v1: 2866.17,1693.07 2886.17,1893.07 2866.17,1933.07 2846.17,1973.07 2886.17,1973.07 2966.17,1973.07 2866.17,2013.07 2846.17,2053.07 2866.17,2093.07 2846.17,2133.07 2886.17,2133.07 2966.17,2133.07
NetD2_1: D2.1 L2.2 Q7.5_8
  other v1: 1266.17,1693.07 1306.17,1693.07 1346.17,1693.07 1306.17,1933.07 1346.17,1933.07 1386.17,1933.07 1326.17,1973.07 1366.17,1973.07 1406.17,1973.07 1306.17,2013.07 1346.17,2013.07 1326.17,2053.07 1306.17,2093.07 1346.17,2093.07 1326.17,2133.07 1366.17,2133.07 1406.17,2133.07 1446.17,2133.07
NetD3_1: D3.1 L3.2 Q6.5_8
  other v1: 2106.17,1693.07 2126.17,1893.07 2106.17,1933.07 2086.17,1973.07 2126.17,1973.07 2206.17,1973.07 2106.17,2013.07 2086.17,2053.07 2106.17,2093.07 2086.17,2133.07 2126.17,2133.07 2206.17,2133.07
NetIC1_4: IC1.4 R9.2 | length 86.4
  Top Layer w9.84: IC1.4 3032.76,2242.13 3047.52,2256.89 R9.2
NetIC2_4: IC2.4 R12.2 | length 92
  Top Layer w9.84: IC2.4 2268.98,2242.13 2287.68,2260.83 R12.2
NetIC3_4: IC3.4 R11.2 | length 95.9
  Top Layer w9.84: IC3.4 1493.39,2242.13 1512.09,2260.83 R11.2
NetQ3_1: Q3.1 Q8.4 R1.1 | length 304.8
  Top Layer w11.81: R1.1 313.66,1712.99 262.28,1764.37 Q8.4 262.28,1789.76 334.72,1862.21 Q3.1
NetQ4_1: Q4.1 R4.2 R6.2 | length 106.6
  Top Layer w11.81: R4.2 R6.2 441.61,2075.39 450.47,2066.54 Q4.1
NetQ4_3: Q4.3 Q8.2 | length 334.8
  Top Layer w11.81: Q8.2 162.28,2119.69 331.77,1950.2 Q4.3
NetQ5_4: Q5.4 R9.1 | length 57.9
  Top Layer w9.84: Q5.4 R9.1
NetQ6_4: Q6.4 R12.1 | length 61.8
  Top Layer w11.81: Q6.4 R12.1
NetQ7_4: Q7.4 R11.1 | length 61.8
  Top Layer w11.81: Q7.4 R11.1
NetQ8_1: Q8.1 R3.2 | length 94.5
  Top Layer w11.81: Q8.1 R3.2
Vena_LED: C5.1 C6.1 C7.1 C11.1 C12.1 C13.1 C17.1 C18.1 C19.1 D1.2 D2.2 D3.2 IC1.1 IC2.1 IC3.1 Q2.3 R7.2 R8.2 R10.2 | length 929.7
  Top Layer w9.84: v1(1236.17,2533.07) 1236.86,2532.38 1236.86,2317.62 C19.1 IC3.1 ; v1(2036.17,2533.07) 2017.08,2513.98 C13.1 IC2.1 ; v1(2736.17,2533.07) 2765.11,2504.13 C7.1 IC1.1
  other v1: 1686.17,1433.07 1636.17,1533.07 1736.17,1533.07 1836.17,1533.07 2436.17,1533.07 2536.17,1533.07 3236.17,1533.07 3336.17,1533.07 1686.17,1633.07 3186.17,1633.07 1636.17,1733.07 1736.17,1733.07 2436.17,1733.07 2536.17,1733.07 3236.17,1733.07 3336.17,1733.07 1686.17,1833.07 2486.17,1833.07 3186.17,1833.07 3286.17,1833.07 1636.17,1933.07 2436.17,1933.07 3136.17,1933.07 3236.17,1933.07 1686.17,2033.07 1786.17,2033.07 2486.17,2033.07 3186.17,2033.07 3286.17,2033.07 1636.17,2133.07 1736.17,2133.07 2436.17,2133.07 2536.17,2133.07 3236.17,2133.07 3336.17,2133.07 586.17,2233.07 686.17,2233.07 786.17,2233.07 886.17,2233.07 1686.17,2233.07 1786.17,2233.07 2486.17,2233.07 3186.17,2233.07 3286.17,2233.07 636.17,2333.07 736.17,2333.07 836.17,2333.07 936.17,2333.07 1636.17,2333.07 1736.17,2333.07 2436.17,2333.07 2536.17,2333.07 3236.17,2333.07 3336.17,2333.07 586.17,2433.07 686.17,2433.07 786.17,2433.07 886.17,2433.07 986.17,2433.07 1586.17,2433.07 1686.17,2433.07 1786.17,2433.07 1886.17,2433.07 2386.17,2433.07 2486.17,2433.07 2586.17,2433.07 3186.17,2433.07 3286.17,2433.07 636.17,2533.07 736.17,2533.07 836.17,2533.07 936.17,2533.07 1036.17,2533.07 1136.17,2533.07 1336.17,2533.07 1436.17,2533.07 1536.17,2533.07 1636.17,2533.07 1736.17,2533.07 1836.17,2533.07 1936.17,2533.07 2136.17,2533.07 2236.17,2533.07 2336.17,2533.07 2436.17,2533.07 2536.17,2533.07 2636.17,2533.07 2836.17,2533.07 2936.17,2533.07 3036.17,2533.07 3136.17,2533.07 3236.17,2533.07 3336.17,2533.07 686.17,2633.07 786.17,2633.07 886.17,2633.07 986.17,2633.07 1086.17,2633.07 1186.17,2633.07 1286.17,2633.07 1386.17,2633.07 1486.17,2633.07 1586.17,2633.07 1686.17,2633.07 1786.17,2633.07 1886.17,2633.07 1986.17,2633.07 2086.17,2633.07 2186.17,2633.07 2286.17,2633.07 2386.17,2633.07 2486.17,2633.07 2586.17,2633.07 2686.17,2633.07 2786.17,2633.07 2886.17,2633.07 2986.17,2633.07 3086.17,2633.07 3186.17,2633.07 3286.17,2633.07
pads on no net: CN1. CN2. CN3. CN4.

## Polygon pours and split planes (outlines as drawn)
GND on Top Layer "NONET_L-01_P-001" (solid, pour order 7): 0,135.01 0,2621.54 cw(c133.46,2621.54) 133.46,2755 3410.54,2755 cw(c3410.54,2621.54) 3544,2621.54 3544,135.01 cw(c3408.99,135.01) 3408.99,0 135.01,0 cw(c135.01,135.01)
AGND on Top Layer "NONET_L-01_P-001" (solid, pour order 6): 1033,2345 1342.87,2345 1342.87,1314 1945,1314 1945,2345 2130,2345 2130,1314 2690,1314 2690,2329 2685,2334 2893,2334 2899,2328 2899.79,1101.18 1142,1107.52 1142,205.31 3.86,209 0,205.14 0,2345.57 0.68,2346.25
GND_ISO_2 on Top Layer "NONET_L-01_P-001" (solid, pour order 0): 948.5,1775.59 573.41,1775.59 472.2,1876.8 202.8,1876.8 134.92,1808.92 134.92,1496.08 212,1419 497.42,1419 586.3,1507.87 901.26,1507.87 901.26,1649.61 917.01,1665.36 948.5,1665.36
GND on Bottom Layer "NONET_L-01_P-001" (solid, pour order 4): -2.12,134.09 -2.12,2620.63 cw(c131.33,2620.63) 131.33,2754.08 3408.42,2754.08 cw(c3408.42,2620.63) 3541.88,2620.63 3541.88,134.09 cw(c3406.87,134.09) 3406.87,-0.92 132.89,-0.92 cw(c132.89,134.09)
AGND on Bottom Layer "NONET_L-01_P-001" (solid, pour order 1): 807,217 296,217 161,352 161,995 44.96,1111.04 44.96,2365 473,2365 1130,2365 1130,216.16

## Keep-outs
Keep-Out Layer:
  the board outline again, w10

## Other copper
Top Layer:
  region net NetCN2_1: 2387,835 2459,907 2459,1044.79 2264.13,1239.66 2243.95,1259.84 2126.83,1259.84 2106.65,1239.66 2106.65,1142.23 2219,1029.87 2219,905 2289,835
  region net NetCN1_1: 3007,836 3055,836 3124,905 3124,1139.63 3003.79,1259.84 2886.67,1259.84 2866.49,1239.66 2866.49,928.51 2959,836
  region net NetCN3_1: 1788,948 1788,906 1720,838 1613,838 1331.06,1119.95 1331.06,1239.66 1351.23,1259.84 1468.36,1259.84 1531.16,1259.84 1788,1003
  region net NetCN3_2: 1899,838 1838,899 1838,1061.81 1732.63,1167.18 1732.63,1195.02 1738.4,1200.79 1874.21,1200.79 1969,1106 2072,1003 2072,906 2004,838
  region net NetCN2_2: 2572,836 2490.5,917.5 2490.5,1167.18 2490.5,1195.02 2496.27,1200.79 2610.72,1200.79 2741,1070.51 2741,908 2669,836
  region net NetCN1_2: 3241.65,840.8 3175.65,906.8 3175.65,1085.04 3294.19,1203.58 3408.64,1203.58 3414.41,1197.82 3414.41,902.56 3352.65,840.8
  region net NetD1_1: 3001.05,1496.06 3021.23,1516.24 3021.23,1613.68 2883.93,1750.98 2883.93,1866.64 2995.24,1977.95 2995.24,2156 2817.29,2156 2817.29,1960.29 2753.51,1896.51 2753.51,1743.6 2863.75,1633.36 2863.75,1516.24 2883.93,1496.06
  region net NetD3_1: 2243.95,1496.06 2264.13,1516.24 2264.13,1613.68 2146.02,1731.79 2146.02,1873.02 2238.14,1965.14 2238.14,2156 2060.19,2156 2060.19,1978.05 1996.41,1914.27 1996.41,1626.48 2106.65,1516.24 2126.83,1496.06
  region net NetD2_1: 1491.11,1514.98 1491.11,1613.68 1470.93,1633.86 1441.71,1633.86 1325.75,1749.82 1325.75,1838.58 1465.12,1977.95 1465.12,2155.91 1287.17,2155.91 1287.17,1924.77 1223.39,1860.99 1223.39,1709.65 1333.63,1599.41 1333.63,1516.24 1353.81,1496.06 1469.48,1496.06
  region net Vena_LED: 964.78,1874.05 568.36,1874.05 568.36,2133.89 568.36,2615.51 645.79,2692.95 3287.53,2692.95 3376.11,2604.36 3376.11,1580.74 3429.78,1527.07 3429.78,1380.03 3199.78,1380.03 3199.78,1595.71 3035.56,1759.93 3035.56,1862.18 3164.78,1991.4 3164.78,2343.25 3059.18,2448.85 2688.45,2448.85 2580.83,2341.24 2580.83,1576.8 2618,1539.64 2618,1397.64 2389.89,1397.64 2389.89,1645.76 2275.72,1759.93 2275.72,1862.18 2389.89,1976.35 2389.89,2334.92 2275.96,2448.85 1925.32,2448.85 1822.96,2346.49 1822.96,1585.84 1858,1550.8 1858,1397.64 1619.78,1397.64 1619.78,1640.28 1500.13,1759.93 1500.13,1862.18 1619.78,1981.83 1619.78,2345.03 1519.9,2444.91 1070.66,2444.91 964.78,2339.03
  region net BAT_EN: 563,1414.69 958.61,1414.69 1124,1249.31 1124,905 1051,832 713.31,832 563,982.31
Bottom Layer:
  region net NetCN1_1: 3007,836 3058,836 3128,906 3128,1135.63 3003.79,1259.84 2886.67,1259.84 2866.49,1239.66 2866.49,928.51 2959,836
  region net NetCN3_1: 1788,948 1788,905 1719,836 1615,836 1331.06,1119.95 1331.06,1239.66 1351.23,1259.84 1468.36,1259.84 1531.16,1259.84 1788,1003
  region net NetCN3_2: 1902,835 1833,904 1833,1066.81 1732.63,1167.18 1732.63,1195.02 1738.4,1200.79 1874.21,1200.79 1969,1106 2072,1003 2072,906 2001,835
  region net NetCN2_1: 2390,836 2457,903 2457,1046.79 2264.13,1239.66 2243.95,1259.84 2126.83,1259.84 2106.65,1239.66 2106.65,1142.23 2220,1028.87 2220,901 2285,836
  region net NetCN2_2: 2570,834 2488,916 2488,1200.79 2610.72,1200.79 2743,1068.51 2743,905 2672,834
  region net NetCN1_2: 3243,834 3173,904 3173,1082.24 3291.55,1200.79 3406,1200.79 3411.76,1195.02 3411.76,899.76 3346,834
  region net NetD1_1: 3003.79,1496.06 3023.97,1516.24 3023.97,1613.68 2858.61,1779.03 2858.61,1838.58 2997.98,1977.95 2997.98,2156 2820.03,2156 2820.03,1924.77 2778,1882.74 2778,1739.31 2866.49,1650.82 2866.49,1516.24 2886.67,1496.06
  region net NetD3_1: 2243.95,1496.06 2264.13,1516.24 2264.13,1613.68 2098.77,1779.03 2098.77,1838.58 2238.14,1977.95 2238.14,2156 2060.19,2156 2060.19,1924.77 2014,1878.59 2014,1750 2106.65,1657.36 2106.65,1516.24 2126.83,1496.06
  region net NetD2_1: 1488.54,1514.98 1488.54,1613.68 1468.36,1633.86 1439.14,1633.86 1323.18,1749.82 1323.18,1838.58 1462.55,1977.95 1462.55,2155.91 1284.6,2155.91 1284.6,1924.77 1220.82,1860.99 1220.82,1709.65 1331.06,1599.41 1331.06,1516.24 1351.23,1496.06 1466.91,1496.06
  region net Vena_LED: 964.78,1874.05 568.36,1874.05 568.36,2133.89 568.36,2615.51 645.79,2692.95 3287.53,2692.95 3376.11,2604.36 3376.11,1580.74 3429.78,1527.07 3429.78,1380.03 3199.78,1380.03 3199.78,1595.71 3035.56,1759.93 3035.56,1862.18 3164.78,1991.4 3164.78,2343.25 3059.18,2448.85 2688.45,2448.85 2580.83,2341.24 2580.83,1576.8 2620,1537.64 2620,1397.64 2389.89,1397.64 2389.89,1645.76 2275.72,1759.93 2275.72,1862.18 2389.89,1976.35 2389.89,2334.92 2275.96,2448.85 1925.32,2448.85 1822.96,2346.49 1822.96,1585.84 1862,1546.8 1862,1397.64 1619.78,1397.64 1619.78,1640.28 1500.13,1759.93 1500.13,1862.18 1619.78,1981.83 1619.78,2345.03 1519.9,2444.91 1070.66,2444.91 964.78,2339.03
  region net BAT_EN: 563,1414.69 958.61,1414.69 1122,1251.31 1122,904 1052,834 711.31,834 563,982.31

## Text inside footprints (layer, text, board x,y; h text height)
B1: Top Overlay "GND" at 186.31,1296.98 h78.74 r180; Top Overlay "V+" at 186.24,1602.06 h78.74 r180; Top Overlay "V-" at 186.24,1493.79 h78.74 r180; Top Overlay "VIN" at 186.24,1396.01 h78.74 r180